# Altium PCB Layout_v1.PcbDoc
Units mm, origin at the board's own origin, x right, y up, seen from the top; angles counter-clockwise.
Board outline 88.89 x 71.11 mm, 2 copper layers (Top Layer, Bottom Layer); 11 components, 22 nets, 104 pads, 0 vias.
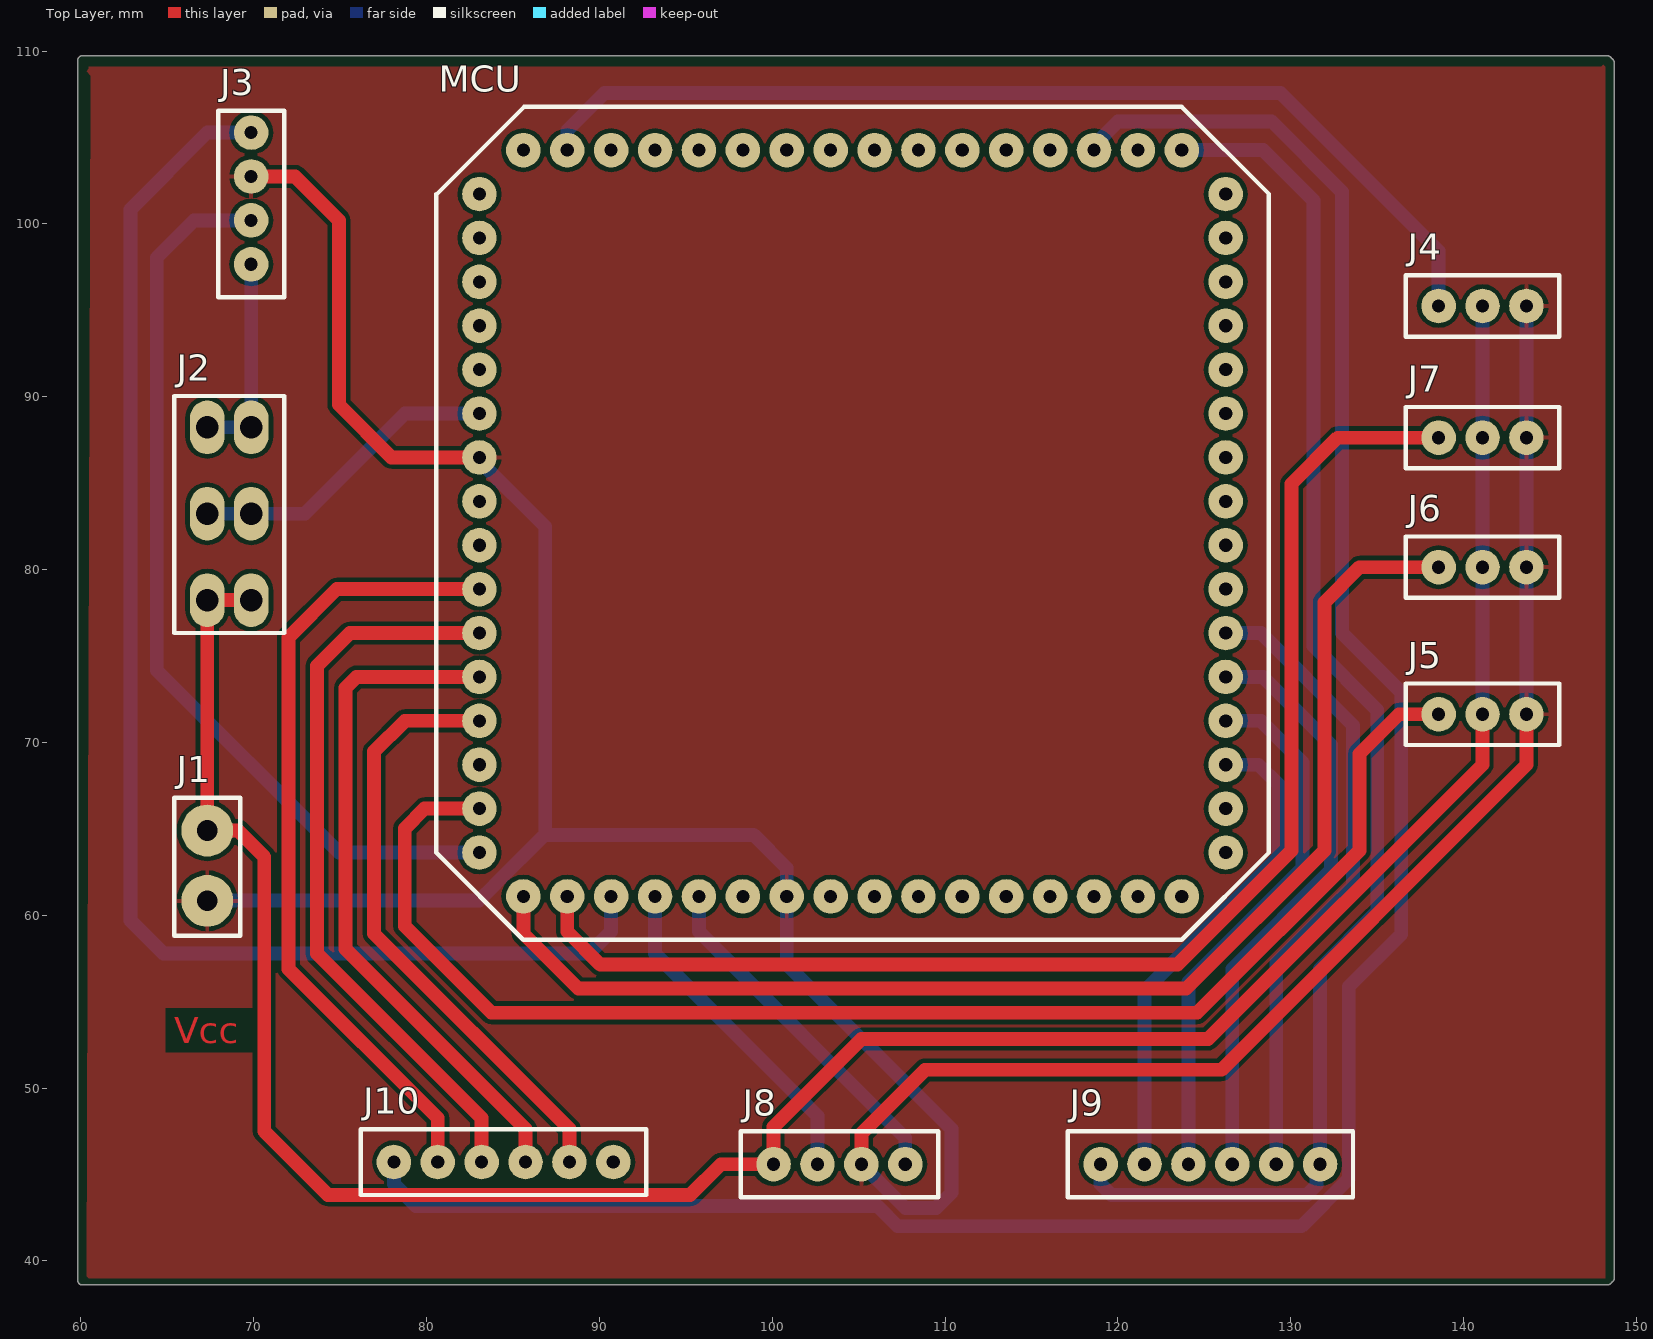
[diagram p0: Top Layer view]
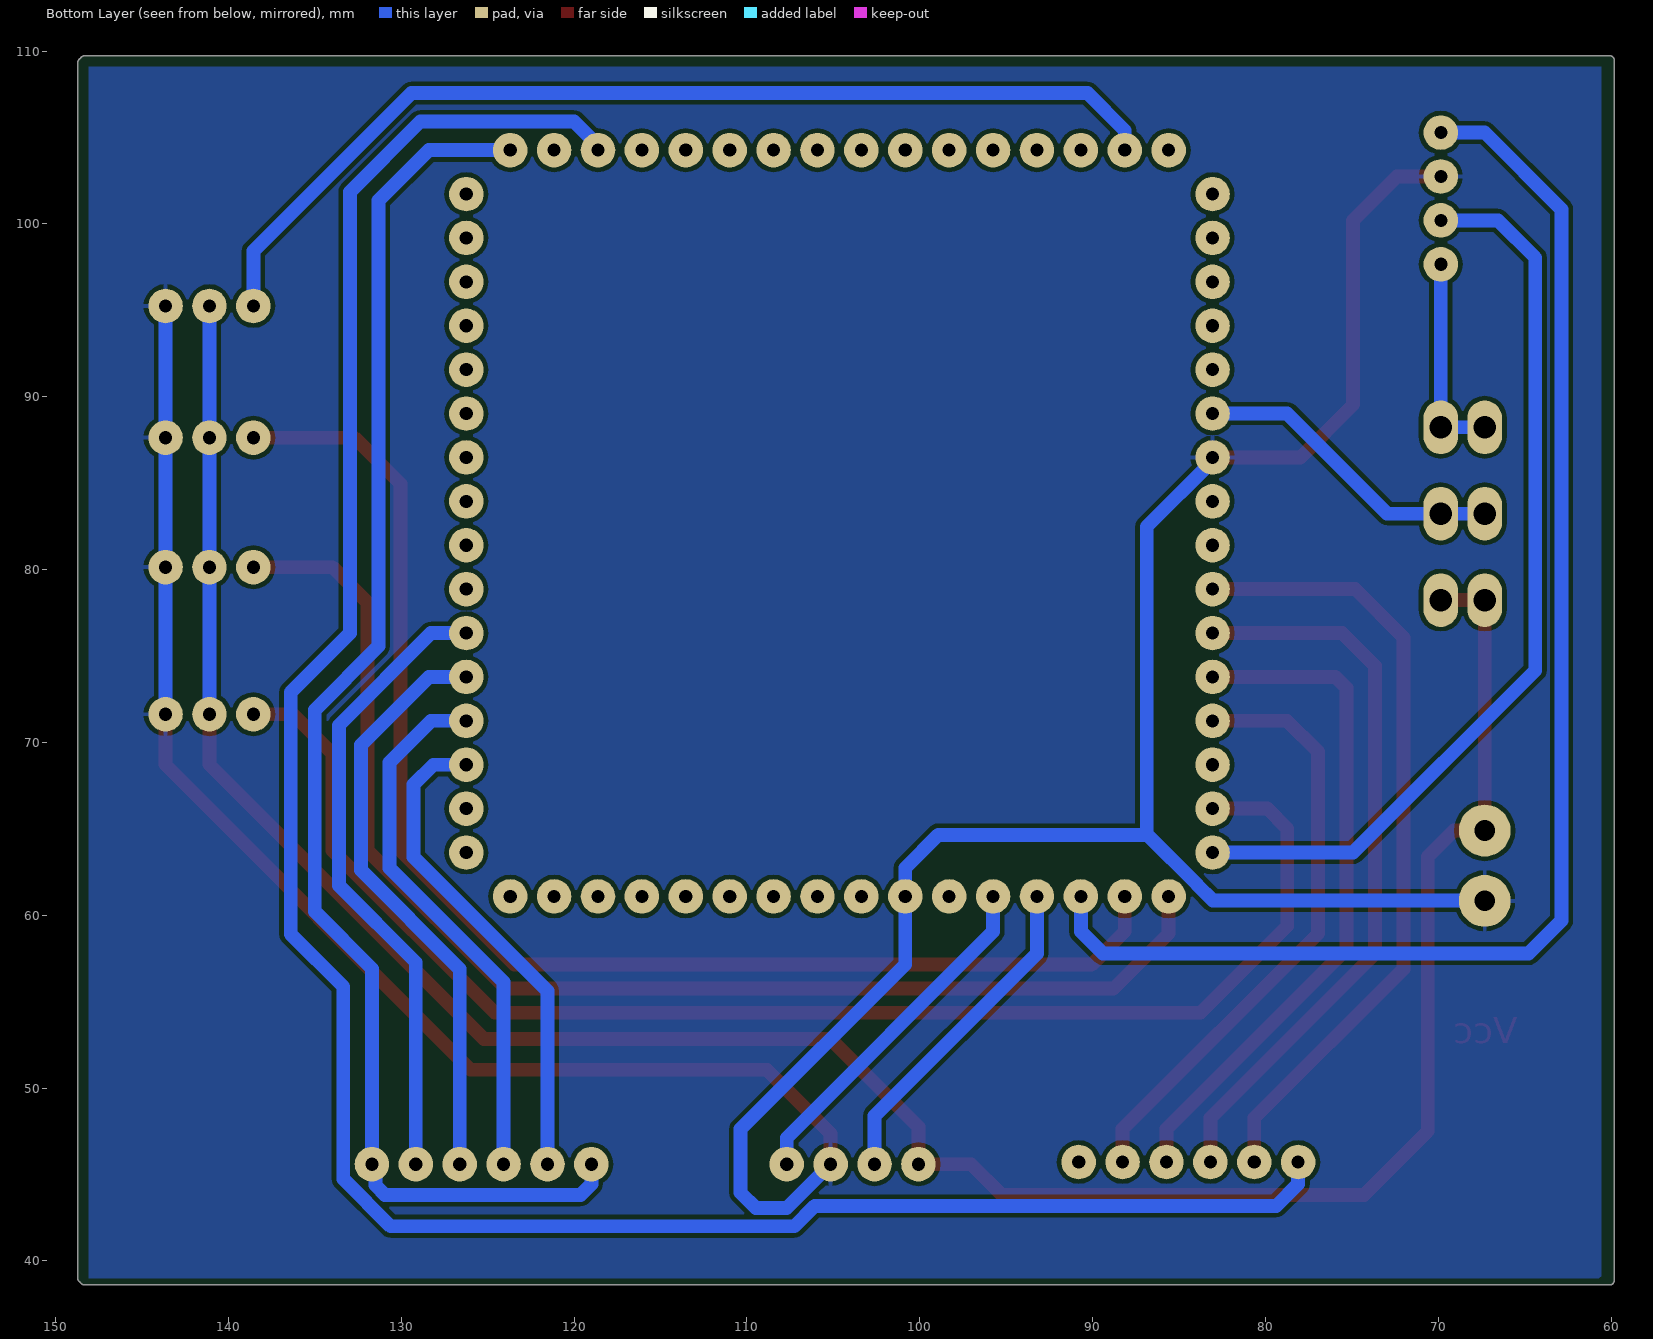
[diagram p1: Bottom Layer view, seen from below]

## Layer stack, top to bottom
Top Layer: signal copper 0.0356
Dielectric: dielectric 0.32, FR-4, Dk 4.8
Bottom Layer: signal copper 0.0356

## Board outline
59.821,38.862 ccw(c60.071,38.862) 60.071,38.612 148.336,38.612 ccw(c148.336,38.862) 148.565,38.76 ccw(c148.463,38.989) 148.713,38.989 148.713,109.347 ccw(c148.463,109.347) 148.565,109.576 ccw(c148.336,109.474) 148.336,109.724 60.071,109.724 ccw(c60.071,109.474) 59.821,109.474

## Design rules (kind name [scope] priority, off if disabled: settings)
Clearance [All] p1: gap=0.254
PolygonConnect [All] p1: connectstyle=Relief reliefconductorwidth=0.254 reliefentries=4 polygonreliefangle="90 Angle"
RoutingLayers [All] p1: top layer_v5=FALSE bottom layer_v5=TRUE
RoutingVias [All] p1: holewidth=0.711 width=1.27 viastyle="Through Hole" minholewidth=0.711 minwidth=1.27 maxholewidth=0.711 maxwidth=1.27
SilkscreenOverComponentPads [All] p1: minsilkscreentomaskgap=0.254
SolderMaskExpansion [All] p1: expansion=0.102
Width [All] p1: maxlimit=1 minlimit=0.254 preferedwidth=0.8
26 further rules are at their usual default settings.

## Components (designator, comment, footprint, x,y, rotation, side; value= is the part's Value field where it differs from the comment)
J1 "Power" Power_2P 67.31,64.897 r0 top
J2 "Switch" Switch_3P 69.85,78.232 r180 top
J3 "ICP" ICP_4P 69.85,97.663 r180 top
J4 "Servo" Servo_3P 138.557,95.25 r90 top
J5 "Light" Servo_3P 138.557,71.628 r90 top
J6 "Light" Servo_3P 138.557,80.137 r90 top
J7 "Touch" Servo_3P 138.557,87.63 r90 top
J8 "UART" UART_4P 100.076,45.593 r90 top
J9 "L298N" L298n-6P 131.699,45.593 r270 top
J10 "L298N" L298n-6P 78.105,45.72 r90 top
MCU "HT66F2390" HT66F2390_64P 83.058,101.727 r0 top

## Footprints (in the part's own frame and the unit in brackets; to place one, negate y for a bottom-side part, rotate by r counter-clockwise, add the part's x,y. Pads: shape width x height; smd on the part's side, far side on the other; paste and mask are expansions set on the pad)
HT66F2390_64P [mm]
  round 2 hole 0.762: 1(0,0) 2(0,-2.54) 3(0,-5.08) 4(0,-7.62) 5(0,-10.16) 6(0,-12.7) 7(0,-15.24) 8(0,-17.78) 9(0,-20.32) 10(0,-22.86) 11(0,-25.4) 12(0,-27.94) 13(0,-30.48) 14(0,-33.02) 15(0,-35.56) 16(0,-38.1) 17(2.54,-40.64) 18(5.08,-40.64) 19(7.62,-40.64) 20(10.16,-40.64) 21(12.7,-40.64) 22(15.24,-40.64) 23(17.78,-40.64) 24(20.32,-40.64) 25(22.86,-40.64) 26(25.4,-40.64) 27(27.94,-40.64) 28(30.48,-40.64) 29(33.02,-40.64) 30(35.56,-40.64) 31(38.1,-40.64) 32(40.64,-40.64) 33(43.18,-38.1) 34(43.18,-35.56) 35(43.18,-33.02) 36(43.18,-30.48) 37(43.18,-27.94) 38(43.18,-25.4) 39(43.18,-22.86) 40(43.18,-20.32) 41(43.18,-17.78) 42(43.18,-15.24) 43(43.18,-12.7) 44(43.18,-10.16) 45(43.18,-7.62) 46(43.18,-5.08) 47(43.18,-2.54) 48(43.18,0) 49(40.64,2.54) 50(38.1,2.54) 51(35.56,2.54) 52(33.02,2.54) 53(30.48,2.54) 54(27.94,2.54) 55(25.4,2.54) 56(22.86,2.54) 57(20.32,2.54) 58(17.78,2.54) 59(15.24,2.54) 60(12.7,2.54) 61(10.16,2.54) 62(7.62,2.54) 63(5.08,2.54) 64(2.54,2.54)
  silkscreen extent -2.5,-43.14 45.68,5.04
ICP_4P [mm]
  round 2 hole 0.762: 1(0,0) 2(0,-2.54) 3(0,-5.08) 4(0,-7.62)
  silkscreen extent -1.91,-8.89 1.91,1.91
L298n-6P [mm] "L298n-6P"
  round 2 hole 0.762: 1(0,0) 2(0,-2.54) 3(0,-5.08) 4(0,-7.62) 5(0,-10.16) 6(0,-12.7)
  silkscreen extent -1.91,-14.6 1.91,1.91
Power_2P [mm]
  round 3 hole 1.2: 1(0,0) 2(0,-4.064)
  silkscreen extent -1.91,-6.1 1.91,1.91
Servo_3P [mm]
  round 2 hole 0.762: 1(0,0) 2(0,-2.54) 3(0,-5.08)
  silkscreen extent -1.78,-6.98 1.78,1.91
Switch_3P [mm]
  oval 2x3.1 hole 1.3: 1(0,0) 1(2.54,0) 2(0,-5) 2(2.54,-5) 3(0,-10) 3(2.54,-10)
  silkscreen extent -1.91,-11.81 4.45,1.91
UART_4P [mm]
  round 2 hole 0.762: 1(0,0) 2(0,-2.54) 3(0,-5.08) 4(0,-7.62)
  silkscreen extent -1.91,-9.53 1.91,1.91

## Part data
J5 J6 J7: library part Servo

## Nets (pads, with @x,y where several pads share a name; then routed paths per layer and width w, separated by ;. In a path a pad name is that pad's centre, name@x,y a point inside that pad or via, vN(x,y) a via of type N, cw(c..) or ccw(c..) an arc to the next point about the centre after c; other vN are vias at no path point)
GND: J1.2 J3.3 J4.3 J5.3 J6.3 J7.3 J8.3 MCU.7 MCU.23 | length 190.5
  Top Layer w0.8: J3.3 72.39,102.743 74.93,100.203 74.93,89.535 77.978,86.487 MCU.7 ; J8.3 105.156,47.371 108.839,51.054 125.984,51.054 143.637,68.707 J5.3
  Bottom Layer w0.8: J1.2@67.31,60.849 83.042,60.849 83.944,61.751 83.944,61.772 86.868,64.696 86.868,82.476 83.058,86.286 MCU.7 ; 86.815,64.643 98.933,64.643 100.838,62.738 MCU.23 100.838,57.15 110.363,47.625 110.363,43.942 109.474,43.053 107.696,43.053 J8.3 ; J5.3 J6.3 J7.3 J4.3
PA0: J3.4 MCU.19 | length 81.1
  Bottom Layer w0.8: J3.4 67.31,105.283 62.865,100.838 62.865,59.69 64.77,57.785 89.408,57.785 90.678,59.055 MCU.19
PA1: J5.1 MCU.15 | length 81.8
  Top Layer w0.8: MCU.15 79.883,66.167 78.74,65.024 78.74,59.36 83.744,54.356 124.587,54.356 133.985,63.754 133.985,69.342 136.271,71.628 137.541,71.628
PA2: J3.2 MCU.16 | length 53.3
  Bottom Layer w0.8: J3.2 66.548,100.203 64.389,98.044 64.389,74.168 74.93,63.627 MCU.16
PA3: J6.1 MCU.17 | length 74.1
  Top Layer w0.8: MCU.17 85.598,58.928 88.773,55.753 123.952,55.753 131.953,63.754 131.953,78.105 133.985,80.137 J6.1@137.668,80.137
PA4: J7.1 MCU.18 | length 77.3
  Top Layer w0.8: MCU.18 88.138,59.055 90.043,57.15 123.444,57.15 130.048,63.754 130.048,84.963 132.715,87.63 137.541,87.63
PA6: J8.2 MCU.20 | length 19.4
  Bottom Layer w0.8: MCU.20 93.218,57.785 102.616,48.387 J8.2
PA7: J8.4 MCU.21 | length 20.4
  Bottom Layer w0.8: MCU.21 95.758,59.055 107.696,47.117 J8.4
PC6: J9.1 J9.6 MCU.49 | length 82.8
  Bottom Layer w0.8: J9.6 118.999,44.45 119.634,43.815 130.937,43.815 131.498,44.376 J9.1@131.498,45.593 ; MCU.49 128.397,104.267 131.318,101.346 131.318,75.565 135.001,71.882 135.001,60.206 131.699,56.904 J9.1
PD0: J10.1 MCU.51 | length 135.1
  Bottom Layer w0.8: J10.1 78.105,44.45 79.375,43.18 106.078,43.18 107.259,41.999 130.612,41.999 133.353,44.74 133.353,55.862 136.398,58.907 136.398,72.898 132.969,76.327 132.969,101.854 128.902,105.921 120.012,105.921 MCU.51@118.618,104.527
PF7: J4.1 MCU.63 | length 59.4
  Bottom Layer w0.8: MCU.63 88.138,105.41 90.297,107.569 129.413,107.569 138.557,98.425 J4.1
PG0: J9.2 MCU.38 | length 36.8
  Bottom Layer w0.8: MCU.38 128.27,76.327 133.604,70.993 133.604,61.722 129.159,57.277 J9.2
PG1: J9.3 MCU.37 | length 34.4
  Bottom Layer w0.8: MCU.37 128.397,73.787 132.334,69.85 132.334,62.611 126.619,56.896 J9.3
PG2: J9.4 MCU.36 | length 31.4
  Bottom Layer w0.8: J9.4 124.079,56.134 130.683,62.738 130.683,68.834 128.27,71.247 MCU.36
PG3: J9.5 MCU.35 | length 28.7
  Bottom Layer w0.8: J9.5 121.539,55.626 129.286,63.373 129.286,67.564 128.143,68.707 MCU.35
PG4: J10.2 MCU.10 | length 46.1
  Top Layer w0.8: J10.2 80.645,48.26 72.009,56.896 72.009,76.073 74.803,78.867 MCU.10
PG5: J10.3 MCU.11 | length 43.2
  Top Layer w0.8: MCU.11@82.804,76.581 MCU.11 75.565,76.327 73.66,74.422 73.66,57.785 83.185,48.26 J10.3
PG6: J10.4 MCU.12 | length 39.8
  Top Layer w0.8: MCU.12 75.946,73.787 75.311,73.152 75.311,58.039 85.725,47.625 J10.4
PG7: J10.5 MCU.13 | length 35.3
  Top Layer w0.8: MCU.13 78.74,71.247 76.962,69.469 76.962,58.928 88.265,47.625 J10.5
VCC: J1.1 J2.1 J4.2 J5.2 J6.2 J7.2 J8.1 | length 145.8
  Top Layer w0.8: J2.1@69.85,78.232 67.31,78.232 J1.1 69.088,64.897 70.612,63.373 70.612,47.498 74.295,43.815 95.25,43.815 97.028,45.593 J8.1 100.076,47.752 105.156,52.832 125.222,52.832 141.097,68.707 J5.2
  Bottom Layer w0.8: J5.2 J6.2 J7.2 J4.2
VCC_2: J2.3 J3.1 | length 12
  Bottom Layer w0.8: J2.3@67.31,88.232 69.85,88.232 J3.1
VDD: J2.2 MCU.6 | length 18.1
  Bottom Layer w0.8: J2.2@67.31,83.232 69.85,83.232 72.945,83.232 ; 72.962,83.248 78.74,89.027 MCU.6
pads on no net: J10.6 MCU.1 MCU.2 MCU.3 MCU.4 MCU.5 MCU.8 MCU.9 MCU.14 MCU.22 MCU.24 MCU.25 MCU.26 MCU.27 MCU.28 MCU.29 MCU.30 MCU.31 MCU.32 MCU.33 MCU.34 MCU.39 MCU.40 MCU.41 MCU.42 MCU.43 MCU.44 MCU.45 MCU.46 MCU.47 MCU.48 MCU.50 MCU.52 MCU.53 MCU.54 MCU.55 MCU.56 MCU.57 MCU.58 MCU.59 MCU.60 MCU.61 MCU.62 MCU.64

## Polygon pours and split planes (outlines as drawn)
GND on Top Layer "Mechanical 1-No Net" (solid, pour order 2): 60.325,39.116 60.452,38.989 148.209,38.989 148.209,109.093 148.082,109.22 147.955,109.093 60.452,109.093 60.452,108.966 60.325,108.839 60.579,108.585 60.579,108.077
GND on Bottom Layer "Mechanical 1-No Net" (solid, remove dead copper, pour order 4): 60.579,109.093 148.082,109.093 148.209,109.22 148.082,109.093 148.082,38.989 60.706,38.989 60.579,39.116

## Other copper
Top Layer:
  text "Vcc" at 65.405,52.578 h1.52

## Silkscreen, mask and mechanical layers (free items; w line width, h text height)
Mechanical 1:
  lines w0.254: 148.336,38.862 148.463,38.989
  lines w0.5: 148.336,38.862 60.071,38.862 60.071,109.474 148.336,109.474 148.463,109.347 148.463,38.989